# EAGLE board amyboard (EAGLE 6.1)
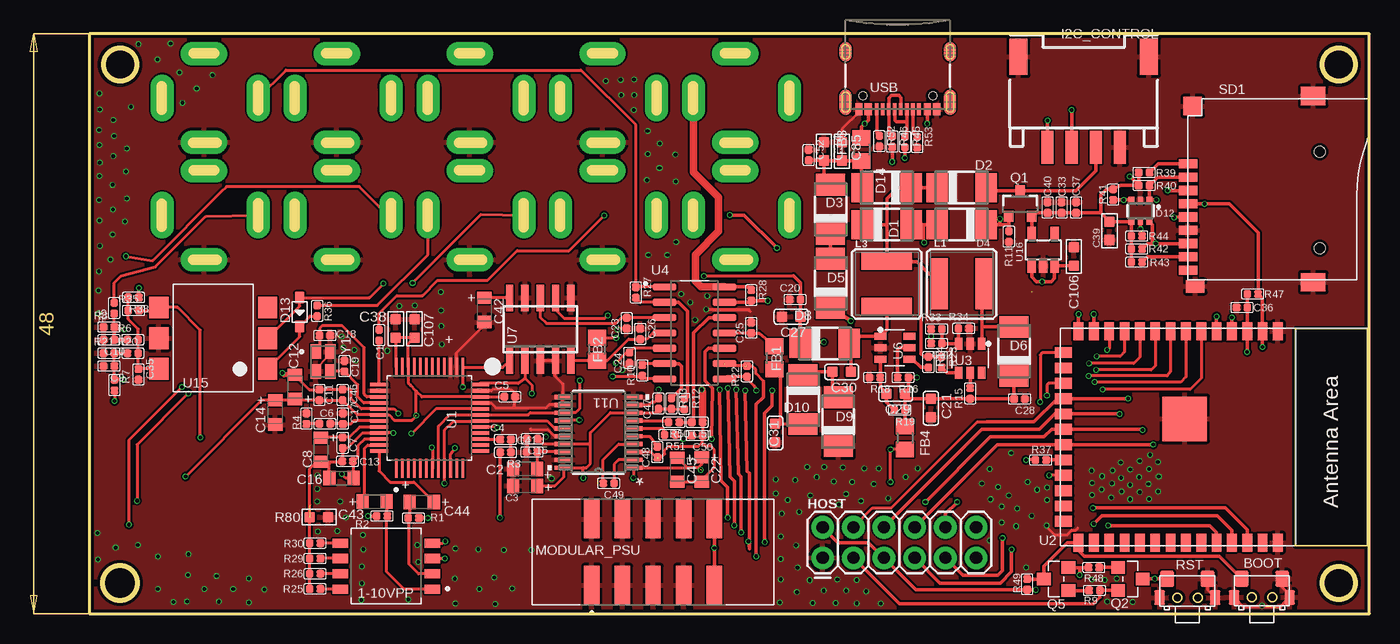
[diagram p0: board, top side]
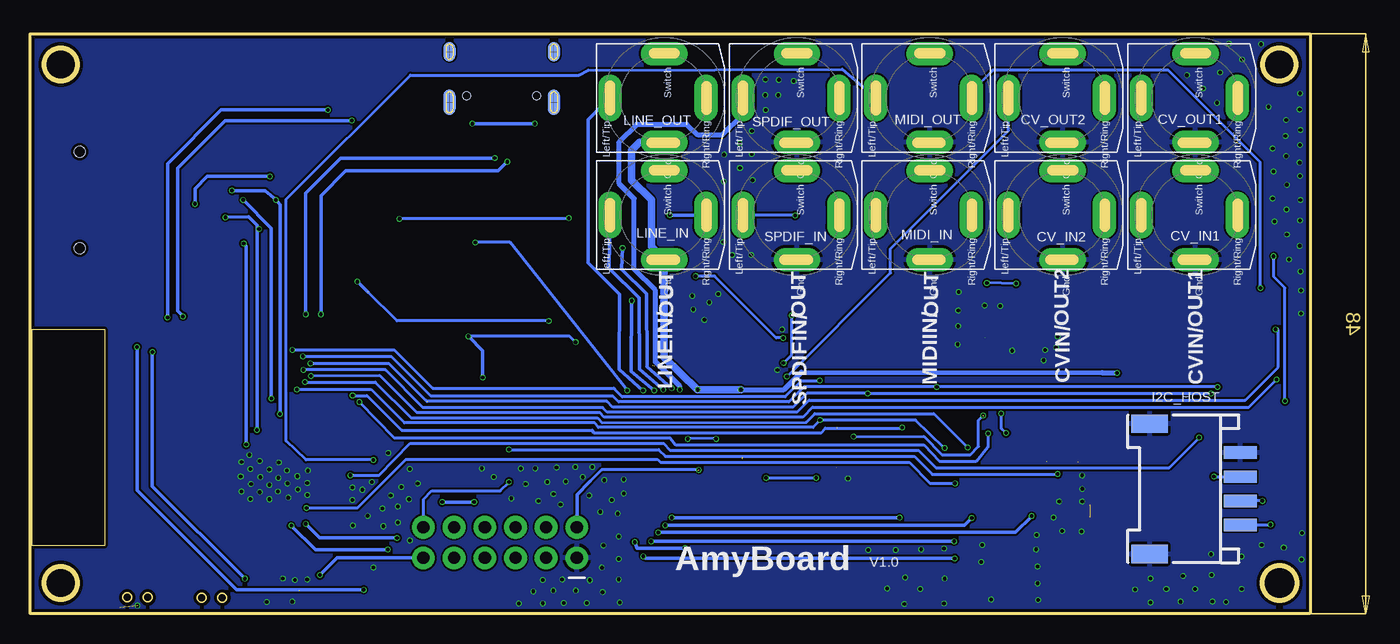
[diagram p1: board, bottom side, seen from below]

Size 106 x 48 mm. Coordinates in mm from the lower left corner, seen from the top.
Outline: 0,0 106,0 106,48 0,48 0,0
Outline: circle at 2.54,45.47 radius 1.37
Outline: circle at 2.54,2.54 radius 1.44
Outline: circle at 103.45,2.54 radius 1.37
Outline: circle at 103.45,45.47 radius 1.37
Copper layers (1*16): Top 0.035mm / dielectric 1.5mm / Bottom 0.035mm
Design rules: minimum track width 6mil, minimum drill 0.3mm, track to track 6mil, track to pad 6mil, pad to pad 6mil, via to via 6mil, smd to smd 6mil, copper to edge 10mil, drill to drill 1mil, minimum pad ring 3mil, minimum via ring 3mil, stop-mask expansion 4mil, vias tented up to drill 0mil, thermal gap 10mil
Net classes: 0 default: width 0.152 mm, drill 0.305 mm, clearance 0.152 mm

## Footprints (pad centres in the part's own frame; a part is rotated, then mirrored left to right if it is on the bottom)
SW_218-4LPSTR = smd 1.27 x 0.76: 1 -3.81,1.905; 2 -3.81,0.635; 3 -3.81,-0.635; 4 -3.81,-1.905; 5 3.81,-1.905; 6 3.81,-0.635; 7 3.81,0.635; 8 3.81,1.905
2*4*3.5MM = smd 1.15 x 1.3: 1 -1.675,0; 2 1.675,0 | smd 0.9 x 1.2: 3 2.3,1.55; 4 -2.3,1.55
DISCRETE_C0402 = smd 0.635 x 0.635: 1 -0.445,0; 2 0.445,0
SMC_Z = smd 1 x 1.2: + -1,0; - 1,0
C0603 = smd 0.889 x 0.889: 1 0,0.762; 2 0,-0.762
DISCRETE_C0603 = smd 0.889 x 0.889: 1 -0.762,0; 2 0.762,0
0603 = smd 0.889 x 0.889: 1 -0.762,0; 2 0.762,0
NV-PJ3410_SOCKET = drill 0.33 pad 1.93 long: GND 3.69,0; LEFT/TIP 0,-4.49; RIGHT/RING 0,3.459; SWITCH -3.674,0
DO-214AC = smd 1.8 x 2.4: A 2.025,0; C -2.025,0
SOT363 = smd 0.5 x 0.5: 1 -0.75,-0.9; 3 0.75,-0.9; 4 0.75,0.9; 6 -0.75,0.9 | smd 0.4 x 0.5: 2 0,-0.9; 5 0,0.9
SOD323 = smd 1 x 0.8: + -1.2,0; - 1.2,0
R0805 = smd 1.3 x 1.5: 1 -0.95,0; 2 0.95,0
2X6 = drill 1.016 pad 1.88: 1 0,0; 2 0,2.54; 3 2.54,0; 4 2.54,2.54; 5 5.08,0; 6 5.08,2.54; 7 7.62,0; 8 7.62,2.54; 9 10.16,0; 10 10.16,2.54; 11 12.7,0; 12 12.7,2.54
HW4-SMD-2.0-90D = smd 1.01 x 2.74: 1 -3,-0.1; 2 -1,-0.1; 3 1,-0.1; 4 3,-0.1 | smd 1.5 x 3: SS1 -5.4,7.4; SS2 5.4,7.4
CR54 = smd 4.2 x 1.4: P$1 0,1.85; P$2 0,-1.85
AMPHENOL_52601-G10-8LF = smd 1.27 x 3.18: 01 -5.08,-2.73; 02 -5.08,2.73; 03 -2.54,-2.73; 04 -2.54,2.73; 05 0,-2.73; 06 0,2.73; 07 2.54,-2.73; 08 2.54,2.73; 09 5.08,-2.73; 10 5.08,2.73
PW20_TEX = smd 1.473 x 0.356: 1 -2.921,2.925; 2 -2.921,2.275; 3 -2.921,1.625; 4 -2.921,0.975; 5 -2.921,0.325; 6 -2.921,-0.325; 7 -2.921,-0.975; 8 -2.921,-1.625; 9 -2.921,-2.275; 10 -2.921,-2.925; 11 2.921,-2.925; 12 2.921,-2.275; 13 2.921,-1.625; 14 2.921,-0.975; 15 2.921,-0.325; 16 2.921,0.325; 17 2.921,0.975; 18 2.921,1.625; 19 2.921,2.275; 20 2.921,2.925
SOT23-3 = smd 0.8 x 0.9: 1 -0.95,-1; 2 0.95,-1; 3 0,1.1
SOT23 = smd 1.016 x 1.143: 1 -0.95,-1.016; 2 0.95,-1.016; 3 0,1.016
DISCRETE_R0402 = smd 0.635 x 0.635: 1 -0.445,0; 2 0.445,0
DISCRETE_R0603 = smd 0.889 x 0.889: 1 -0.762,0; 2 0.762,0
9P-SMD-W/-RING = smd 1.524 x 0.762: 1 0,4.4; 2 0,3.3; 3 0,2.2; 4 0,1.1; 5 0,0; 6 0,-1.1; 7 0,-2.2; 8 0,-3.3; 9 0,-4.4 | smd 1.524 x 1.016: G1 0.6,-5.746 | smd 2.032 x 1.524: G2 10.373,-5.4; G3 10.373,10 | smd 1.524 x 1.524: G4 0.392,9.181 | hole 0.889: 10.9,-2.6; 10.9,5.4
QFP50P900X900X160-48N = smd 1.56 x 0.28: 1 -4.18,2.75; 2 -4.18,2.25; 3 -4.18,1.75; 4 -4.18,1.25; 5 -4.18,0.75; 6 -4.18,0.25; 7 -4.18,-0.25; 8 -4.18,-0.75; 9 -4.18,-1.25; 10 -4.18,-1.75; 11 -4.18,-2.25; 12 -4.18,-2.75; 25 4.18,-2.75; 26 4.18,-2.25; 27 4.18,-1.75; 28 4.18,-1.25; 29 4.18,-0.75; 30 4.18,-0.25; 31 4.18,0.25; 32 4.18,0.75; 33 4.18,1.25; 34 4.18,1.75; 35 4.18,2.25; 36 4.18,2.75 | smd 0.28 x 1.56: 13 -2.75,-4.18; 14 -2.25,-4.18; 15 -1.75,-4.18; 16 -1.25,-4.18; 17 -0.75,-4.18; 18 -0.25,-4.18; 19 0.25,-4.18; 20 0.75,-4.18; 21 1.25,-4.18; 22 1.75,-4.18; 23 2.25,-4.18; 24 2.75,-4.18; 37 2.75,4.18; 38 2.25,4.18; 39 1.75,4.18; 40 1.25,4.18; 41 0.75,4.18; 42 0.25,4.18; 43 -0.25,4.18; 44 -0.75,4.18; 45 -1.25,4.18; 46 -1.75,4.18; 47 -2.25,4.18; 48 -2.75,4.18
ESP32-­S2-­SOLO = smd 1.5 x 0.9: 1 -8.75,5.26; 2 -8.75,3.99; 3 -8.75,2.72; 4 -8.75,1.45; 5 -8.75,0.18; 6 -8.75,-1.09; 7 -8.75,-2.36; 8 -8.75,-3.63; 9 -8.75,-4.9; 10 -8.75,-6.17; 11 -8.75,-7.44; 12 -8.75,-8.71; 13 -8.75,-9.98; 14 -8.75,-11.25; 27 8.75,-11.25; 28 8.75,-9.98; 29 8.75,-8.71; 30 8.75,-7.44; 31 8.75,-6.17; 32 8.75,-4.9; 33 8.75,-3.63; 34 8.75,-2.36; 35 8.75,-1.09; 36 8.75,0.18; 37 8.75,1.45; 38 8.75,2.72; 39 8.75,3.99; 40 8.75,5.26 | smd 0.9 x 1.5: 15 -6.985,-12.5; 16 -5.715,-12.5; 17 -4.445,-12.5; 18 -3.175,-12.5; 19 -1.905,-12.5; 20 -0.635,-12.5; 21 0.635,-12.5; 22 1.905,-12.5; 23 3.175,-12.5; 24 4.445,-12.5; 25 5.715,-12.5; 26 6.985,-12.5 | smd 3.7 x 3.7: 41 -1.5,-2.46
SOT-23-6 = smd 1 x 0.6: 1 -1.2,0.95; 2 -1.2,0; 3 -1.2,-0.95; 4 1.2,-0.95; 5 1.2,0; 6 1.2,0.95
SOIC127P600X175-14N = smd 1.97 x 0.6: 1 -2.475,3.81; 2 -2.475,2.54; 3 -2.475,1.27; 4 -2.475,0; 5 -2.475,-1.27; 6 -2.475,-2.54; 7 -2.475,-3.81; 8 2.475,-3.81; 9 2.475,-2.54; 10 2.475,-1.27; 11 2.475,0; 12 2.475,1.27; 13 2.475,2.54; 14 2.475,3.81
SOIC-10 = smd 0.6 x 2.2: 1 -2.54,-2.6; 2 -1.27,-2.6; 3 0,-2.6; 4 1.27,-2.6; 5 2.54,-2.6; 6 2.54,2.6; 7 1.27,2.6; 8 0,2.6; 9 -1.27,2.6; 10 -2.54,2.6
SOP-6-2.54MM = smd 1.6 x 1.8: 1 -4.5,2.54; 2 -4.5,0; 3 -4.5,-2.54; 4 4.5,-2.54; 5 4.5,0; 6 4.5,2.54
SOT23-5 = smd 0.69 x 1.2: 1 -0.95,-1.3; 2 0,-1.3; 3 0.95,-1.3; 4 0.95,1.3; 5 -0.95,1.3
USB-C-16P-5 = smd 0.3 x 1: A5 -1.25,-0.34; A6 -0.25,-0.34; A7 0.25,-0.34; A8 1.25,-0.34; B5 1.75,-0.34; B6 0.75,-0.34; B7 -0.75,-0.34; B8 -1.75,-0.34 | smd 0.6 x 1: GND -3.225,-0.34; GND2 3.225,-0.34; VBUS1 -2.45,-0.34; VBUS2 2.45,-0.34 | smd 1 x 2.1: SHLD1 -4.32,-0.915; SHLD2 4.32,-0.915 | smd 1 x 2.1 bottom: SHLD3 -4.32,-0.915; SHLD4 4.32,-0.915 | smd 1 x 1.6: SHLD5 -4.32,-5.095; SHLD8 4.32,-5.095 | smd 1 x 1.6 bottom: SHLD6 -4.32,-5.095; SHLD7 4.32,-5.095 | hole 0.65: -2.89,-1.445; 2.89,-1.445
XTAL_ABM10W-22.5792MHZ-8-K1Z-T3 = smd 0.85 x 1.2: 1 -0.6,0.812; 2 -0.6,-0.812; 3 0.6,-0.812; 4 0.6,0.812

## Placement (x,y rotation side)
1-10VPP  218-4LPSTR  [SW_218-4LPSTR]  24.59,3.94 180 top
BOOT  TS24CA  [2*4*3.5MM]  97.1,2.9 180 top
C1  100nF  [DISCRETE_C0402]  24,23.06 90 top
C2  10uF/10V/TAN  [SMC_Z]  36.09,11.99 180 top
C3  10uF/10V/TAN  [SMC_Z]  36.09,10.59 180 top
C4  100nF  [DISCRETE_C0402]  34.47,14.43 0 top
C5  100nF  [DISCRETE_C0402]  34.82,17.96 0 top
C6  68nF  [DISCRETE_C0402]  19.51,15.72 0 top
C7  100nF  [DISCRETE_C0402]  20.98,14.15 270 top
C8  10uF/10V/TAN  [SMC_Z]  19.18,13.56 270 top
C9  1nF  [DISCRETE_C0402]  1.63,20.5 180 top
C10  1nF  [DISCRETE_C0402]  1.63,22.68 180 top
C11  100nF  [DISCRETE_C0402]  19.05,18.11 90 top
C12  10uF/10V/TAN  [SMC_Z]  17.04,18.77 90 top
C13  100nF  [DISCRETE_C0402]  21.39,12.62 180 top
C14  10uF/10V/TAN  [SMC_Z]  15.39,16.66 270 top
C15  100nF  [DISCRETE_C0402]  36.68,14.48 180 top
C16  10uF/10V/TAN  [SMC_Z]  20.88,11.23 180 top
C17  4.7nF  [DISCRETE_C0402]  21.01,16.15 270 top
C18  10pF  [DISCRETE_C0402]  19.51,23.04 180 top
C19  10pF  [DISCRETE_C0402]  21.13,20.5 270 top
C20  100nF  [DISCRETE_C0402]  58.45,26.01 0 top
C21  22uF  [C0603]  69.7,17.02 0 top
C22  10uF/10V/TAN  [SMC_Z]  50.7,11.94 270 top
C23  100nF  [DISCRETE_C0402]  44.5,24.05 90 top
C24  100nF  [DISCRETE_C0402]  44.73,21.18 90 top
C25  100nF  [DISCRETE_C0402]  54.81,23.67 90 top
C26  100nF  [DISCRETE_C0402]  45.62,23.16 270 top
C27  22uF  [C0603]  58.12,24.59 270 top
C28  100nF  [DISCRETE_C0402]  77.04,17.78 180 top
C29  22pF  [C0603]  66.78,18.21 270 top
C30  22uF  [C0603]  62.31,20.02 270 top
C31  22uF  [C0603]  56.79,14.96 180 top
C32  22pF  [DISCRETE_C0402]  70.15,22.38 180 top
C33  100nF  [DISCRETE_C0402]  80.52,33.63 270 top
C34  10uF  [DISCRETE_C0603]  60.83,38.28 270 top
C35  100nF  [DISCRETE_C0402]  4.06,19.81 270 top
C36  100nF  [DISCRETE_C0402]  95.45,25.35 0 top
C37  100nF  [DISCRETE_C0402]  81.71,33.63 270 top
C38  10uF  [DISCRETE_C0603]  25.37,23.6 90 top
C39  10uF  [DISCRETE_C0603]  84.48,31.7 90 top
C40  100nF  [DISCRETE_C0402]  79.35,33.63 90 top
C41  100nF  [DISCRETE_C0402]  36.65,13.39 0 top
C42  10uF/10V/TAN  [SMC_Z]  32.72,25.15 270 top
C43  10uF/10V/TAN  [SMC_Z]  23.62,9.27 0 top
C44  10uF/10V/TAN  [SMC_Z]  27.53,9.25 180 top
C45  10uF/10V/TAN  [SMC_Z]  48.69,11.91 270 top
C46  100nF  [DISCRETE_C0402]  20.98,18.11 90 top
C47  100nF  [DISCRETE_C0402]  47.14,17.4 90 top
C48  2.2uF  [DISCRETE_C0402]  47.04,13.39 90 top
C49  2.2uF  [DISCRETE_C0402]  43,10.79 180 top
C50  2.2nF  [DISCRETE_C0402]  50.34,14.76 180 top
C51  2.2nF  [DISCRETE_C0402]  50.34,15.85 180 top
C52  100nF  [DISCRETE_C0402]  59.56,37.97 270 top
C85  10uF  [DISCRETE_C0603]  62.33,38.28 270 top
C106  4.7uF/16V  [0603]  81.53,29.57 90 top
C107  10uF  [0603]  26.92,23.6 90 top
CV_IN1  NV-PJ3410_STEREO  [NV-PJ3410_SOCKET]  9.5,33 270 bottom
CV_IN2  NV-PJ3410_STEREO  [NV-PJ3410_SOCKET]  20.5,33 270 bottom
CV_OUT1  NV-PJ3410_STEREO  [NV-PJ3410_SOCKET]  9.5,42.7 270 bottom
CV_OUT2  NV-PJ3410_STEREO  [NV-PJ3410_SOCKET]  20.5,42.7 270 bottom
D1  SS54  [DO-214AC]  66.04,32.21 0 top
D2  SS54  [DO-214AC]  72.24,35.28 0 top
D3  SS54  [DO-214AC]  61.39,33.48 90 top
D4  SS54  [DO-214AC]  72.24,32.21 180 top
D5  SS54  [DO-214AC]  61.39,27.36 90 top
D6  SS54  [DO-214AC]  76.58,21.72 90 top
D8  SS54  [DO-214AC]  60.91,22.38 0 top
D9  SS54  [DO-214AC]  62.03,15.9 90 top
D10  SS54  [DO-214AC]  59.11,17.73 270 top
D12  SMF05C  [SOT363]  87.05,33.35 180 top
D13  1N4148WS  [SOD323]  17.42,24.97 270 top
D14  SS54  [DO-214AC]  66.04,35.28 180 top
FB1  100Mhz@120R  [R0805]  56.74,21.18 90 top
FB2  100Mhz@120R  [R0805]  42.04,21.89 270 top
FB3  100Mhz@120R  [R0805]  63.96,38.43 270 top
FB4  100Mhz@120R  [R0805]  67.54,14.55 270 top
HOST  2X6 FEMALE  [2X6]  60.73,4.62 0 top
I2C_CONTROL  [HW4-SMD-2.0-90D]  82.35,38.71 0 top
I2C_HOST  [HW4-SMD-2.0-90D]  5.89,10.34 90 bottom
L1  4.7µH/±30%/3.4A  [CR54]  72.24,27.3 90 top
L3  3.3µH/±30%/3.4A  [CR54]  66.04,27.3 0 top
LINE_IN  NV-PJ3410_STEREO  [NV-PJ3410_SOCKET]  53.5,33 270 bottom
LINE_OUT  NV-PJ3410_STEREO  [NV-PJ3410_SOCKET]  53.5,42.7 270 bottom
MIDI_IN  NV-PJ3410_STEREO  [NV-PJ3410_SOCKET]  31.5,33 270 bottom
MIDI_OUT  NV-PJ3410_STEREO  [NV-PJ3410_SOCKET]  31.5,42.7 270 bottom
MODULAR_PSU  52601-G10-8LF  [AMPHENOL_52601-G10-8LF]  46.69,5.11 0 top
PCM5101  U11  [PW20_TEX]  42.16,15.01 180 top
Q1  AO3407  [SOT23-3]  77.09,33.91 0 top
Q2  S8050  [SOT23]  86.21,2.87 270 top
Q5  S8050  [SOT23]  80.06,2.87 90 top
R1  51K  [DISCRETE_R0402]  26.85,7.92 0 top
R2  51K  [DISCRETE_R0402]  24.23,8.08 180 top
R3  150R  [DISCRETE_R0402]  34.47,13.36 180 top
R4  680R  [DISCRETE_R0402]  17.98,16.15 90 top
R5  30K  [DISCRETE_R0402]  2.06,25.3 90 top
R6  10K  [DISCRETE_R0402]  3.61,22.68 0 top
R7  30K  [DISCRETE_R0402]  2.08,18.92 270 top
R8  15K  [DISCRETE_R0402]  1.63,23.72 0 top
R9  10K  [DISCRETE_R0402]  83.24,1.93 0 top
R10  30K  [DISCRETE_R0402]  45.8,20.14 90 top
R11  100K  [DISCRETE_R0402]  76.15,31.22 90 top
R12  10K  [DISCRETE_R0402]  49.28,17.37 270 top
R13  10K  [DISCRETE_R0402]  48.21,17.4 270 top
R14  100K  [DISCRETE_R0402]  69.49,20.83 270 top
R15  0R  [DISCRETE_R0402]  72.95,18.24 90 top
R16  0R  [DISCRETE_R0402]  67.39,19.56 180 top
R18  12K  [DISCRETE_R0402]  65.05,19.56 180 top
R19  228K  [DISCRETE_R0402]  67.11,16.87 180 top
R20  10K  [DISCRETE_R0402]  3.61,21.56 0 top
R21  15K  [DISCRETE_R0402]  1.63,21.56 0 top
R22  51K  [DISCRETE_R0402]  54.46,20.07 90 top
R23  100K  [DISCRETE_R0402]  70.59,20.83 270 top
R25  22K  [DISCRETE_R0402]  18.69,2.06 0 top
R26  22K  [DISCRETE_R0402]  18.69,3.3 0 top
R27  30K  [DISCRETE_R0402]  45.26,26.59 270 top
R28  51K  [DISCRETE_R0402]  54.81,26.37 270 top
R29  22K  [DISCRETE_R0402]  18.69,4.57 0 top
R30  22K  [DISCRETE_R0402]  18.69,5.84 0 top
R33  110K  [DISCRETE_R0402]  70.15,23.57 0 top
R34  15K  [DISCRETE_R0402]  72.42,23.62 0 top
R35  470R  [DISCRETE_R0402]  3.66,25.1 0 top
R36  220R  [DISCRETE_R0402]  18.87,25.07 270 top
R37  10R  [DISCRETE_R0402]  78.79,12.73 0 top
R38  33R  [DISCRETE_R0402]  3.66,26.19 180 top
R39  10K  [DISCRETE_R0402]  87.35,36.53 180 top
R40  10K  [DISCRETE_R0402]  87.35,35.46 180 top
R41  10K  [DISCRETE_R0402]  84.79,34.7 90 top
R42  10K  [DISCRETE_R0402]  86.74,30.2 180 top
R43  10K  [DISCRETE_R0402]  86.74,29.11 180 top
R44  NC  [DISCRETE_R0402]  86.74,31.27 180 top
R45  51R  [DISCRETE_R0402]  67.54,39.07 270 top
R46  51R  [DISCRETE_R0402]  66.5,39.09 270 top
R47  10K  [DISCRETE_R0402]  96.34,26.47 0 top
R48  10K  [DISCRETE_R0402]  83.19,3.84 180 top
R49  10K  [DISCRETE_R0402]  77.67,2.44 270 top
R50  470R  [DISCRETE_R0402]  48.41,15.85 180 top
R51  470R  [DISCRETE_R0402]  48.08,14.81 180 top
R52  5.1K  [DISCRETE_R0402]  65.43,39.12 270 top
R53  5.1K  [DISCRETE_R0402]  68.55,39.04 270 top
R80  0R  [DISCRETE_R0603]  19.02,8 0 top
RST  TS24CA  [2*4*3.5MM]  90.93,2.88 180 top
SD1  SD  [9P-SMD-W/-RING]  90.98,32.84 0 top
SPDIF_IN  NV-PJ3410_STEREO  [NV-PJ3410_SOCKET]  42.5,33 270 bottom
SPDIF_OUT  NV-PJ3410_STEREO  [NV-PJ3410_SOCKET]  42.5,42.7 270 bottom
U1  PCM9211PT  [QFP50P900X900X160-48N]  28.17,16.21 90 top
U2  ESP32­S2­SOLO  [ESP32-­S2-­SOLO]  93.17,14.63 270 top
U3  HX3608  [SOT-23-6]  72.95,21.16 270 top
U4  TL074CD  [SOIC127P600X175-14N]  50.11,23.24 0 top
U6  HX3608  [SOT-23-6]  66.7,22.02 0 top
U7  GP8413  [SOIC-10]  37.34,23.55 0 top
U15  H11L1SR2M  [SOP-6-2.54MM]  10.26,22.81 180 top
U16  SPX3819  [SOT23-5]  78.99,30.12 0 top
USB  USB-C  [USB-C-16P-5]  66.95,41.43 180 top
Y1  22.5792MHZ  [XTAL_ABM10W-22.5792MHZ-8-K1Z-T3]  19.35,20.88 0 top

## Library data of the parts
1-10VPP = 218-4LPSTR; AVAILABILITY: In Stock; CHECK_PRICES: https://www.snapeda.com/parts/218-4LPSTR/CTS+Components/view-part/?ref=eda; DESCRIPTION: Dip Switch SPST 4 Position Surface Mount Slide (Standard) Actuator 25mA 24VDC; MF: CTS Electrocomponents; MP: 218-4LPSTR; PACKAGE: None; PRICE: None; SNAPEDA_LINK: https://www.snapeda.com/parts/218-4LPSTR/CTS+Components/view-part/?ref=snap
BOOT RST U15 = sale
C1 C4-C7 C9-C11 C13 C15 C17-C20 C23-C26 C28 C32-C41 C46-C52 C85 R1-R16 R18-R23 R25-R30 R33-R53 R80 = A9G
C2 C3 C8 C12 C14 C16 C22 C42-C45 FB1-FB4 = rcl
C21 C27 C29-C31 = Discrete-new
C106 C107 D13 Q2 Q5 = Discrete
CV_IN1 CV_IN2 CV_OUT1 CV_OUT2 LINE_IN LINE_OUT MIDI_IN MIDI_OUT SPDIF_IN SPDIF_OUT = PJ3410_sockets
D1-D6 D8-D10 D14 = diode
D12 = microbuilder
HOST = SparkFun-Connectors; PROD_ID: CONN-12423
I2C_CONTROL I2C_HOST = Connector-new
L1 L3 = SparkFun-Coils; PROD_ID: NDUC-11157
MODULAR_PSU = 52601-G10-8LF; AVAILABILITY: In Stock; CHECK_PRICES: https://www.snapeda.com/parts/52601-G10-8LF/Amphenol+FCI/view-part/?ref=eda; DESCRIPTION: Conn; Rect; Header; SMT; Shroud; 2.54 mm; 2-Row; 10 Pos; Gold (30) Plate;Quickie | Amphenol FCI (Amphenol CS) 52601-G10-8LF; MF: Amphenol ICC; MP: 52601-G10-8LF; PACKAGE: None; PRICE: None; SNAPEDA_LINK: https://www.snapeda.com/parts/52601-G10-8LF/Amphenol+FCI/view-part/?ref=snap
PCM5101 = pcm5101apw; COPYRIGHT: Copyright (C) 2022 Ultra Librarian. All rights reserved.; DIGI-KEY_PART_NUMBER_1: PCM5101APW-ND; MANUFACTURER_PART_NUMBER: PCM5101APW; MFR_NAME: Texas Instruments
Q1 = User-Submitted; PROD_ID: TRANS-08285
SD1 = Connector
U1 = PCM9211PT; AVAILABILITY: In Stock; CHECK_PRICES: https://www.snapeda.com/parts/PCM9211PT/Texas+Instruments/view-part/?ref=eda; DESCRIPTION: 216kHz Digital Audio Interface Transceiver (DIX) with Stereo ADC and Routing; MF: Texas Instruments; MP: PCM9211PT; PACKAGE: LQFP-48 Texas Instruments; PRICE: None; SNAPEDA_LINK: https://www.snapeda.com/parts/PCM9211PT/Texas+Instruments/view-part/?ref=snap
U2 U3 U6 = self
U4 = TL074CD; AVAILABILITY: In Stock; CHECK_PRICES: https://www.snapeda.com/parts/TL074CD/Texas+Instruments/view-part/?ref=eda; DESCRIPTION: Quad, 30-V, 3-MHz, high slew rate (13-V/µs), In to V+, JFET-input op amp; MF: Texas Instruments; MP: TL074CD; PACKAGE: SOIC-14 Texas Instruments; PRICE: None; SNAPEDA_LINK: https://www.snapeda.com/parts/TL074CD/Texas+Instruments/view-part/?ref=snap
U7 = FL5160MX; AVAILABILITY: In Stock; CHECK_PRICES: https://www.snapeda.com/parts/FL5160MX/Onsemi/view-part/?ref=eda; DESCRIPTION: Optocoupler Drive 1-CH 5.5V 10-Pin SOIC N T/R; MF: onsemi; MP: FL5160MX; PACKAGE: None; PRICE: None; SNAPEDA_LINK: https://www.snapeda.com/parts/FL5160MX/Onsemi/view-part/?ref=snap
U16 = IC
USB = USBC
Y1 = ABM10W-22.5792MHZ-8-K1Z-T3; AVAILABILITY: In Stock; CHECK_PRICES: https://www.snapeda.com/parts/ABM10W-22.5792MHZ-8-K1Z-T3/Abracon/view-part/?ref=eda; DESCRIPTION: IoT OPTIMIZED LOW PROFILE QUARTZ CRYSTAL; MF: Abracon; MP: ABM10W-22.5792MHZ-8-K1Z-T3; PACKAGE: SMD-4 Abracon; PRICE: None; SNAPEDA_LINK: https://www.snapeda.com/parts/ABM10W-22.5792MHZ-8-K1Z-T3/Abracon/view-part/?ref=snap

## Nets
3.3V: C35.1 R6.2 R20.2 R35.1 R38.2 U15.6
3V3_IN: D2.A I2C_CONTROL.3 Q1.3
5V: C13.1 C16.+ FB4.2 HOST.12 U1.46
5V_IN: C34.2 C52.2 C85.2 D3.A D14.A FB3.2
12_IN: D1.A D4.A MODULAR_PSU.09 MODULAR_PSU.10
12V: C20.2 C21.1 C27.1 C28.2 C29.1 C32.2 D6.C D8.C FB2.1 FB4.1 R15.1 R16.1 R19.1 R33.1
+3V3: C3.+ C5.1 C11.1 C12.+ C14.+ C15.1 C22.+ C33.2 C37.2 C38.1 C39.2 C40.1 C45.+ C46.1 C47.1 C107.1 D12.4 HOST.2 HOST.5 I2C_HOST.3 PCM5101.1 PCM5101.8 PCM5101.17 PCM5101.20 Q1.2 R12.2 R13.2 R39.2 R40.2 R41.2 R42.2 R43.2 R44.2 R47.2 R49.2 SD1.4 U1.22 U1.34 U1.36 U1.42 U2.2 U16.5
+12V: C26.2 FB2.2 U4.4 U7.5
-12V: C25.1 FB1.2 U4.11
ADC1: C10.1 R5.1 R6.1 R8.2 U2.9
ADC2: C9.1 R7.1 R20.1 R21.2 U2.8
AGND: C7.2 C8.- C11.2 C12.- C13.2 C16.- C22.- C45.- C46.2 C47.2 C48.1 C50.1 C51.1 LINE_IN.GND LINE_OUT.GND PCM5101.3 PCM5101.9 R25.1 R26.1 R29.1 R30.1 R80.1 U1.41 U1.45
AMY_FOLLOWER_SCL: I2C_CONTROL.1 U2.5
AMY_FOLLOWER_SDA: I2C_CONTROL.2 U2.4
AMYIN: U1.17 U2.17
AMYOUT: PCM5101.14 U1.10 U2.6
BCLK: PCM5101.13 U1.8 U1.19 U2.12
CV_OUT1: CV_OUT1.LEFT/TIP R27.1 U4.1
CV_OUT2: CV_OUT2.LEFT/TIP R10.1 U4.7
DTR: HOST.11 Q5.2 R48.2
ENABLE: R14.2 U6.4
ENABLE1: R23.2 U3.4
GND: BOOT.1 BOOT.3 BOOT.4 C2.- C3.- C5.2 C9.2 C10.2 C14.- C15.2 C17.1 C18.1 C19.1 C20.1 C21.2 C23.1 C24.1 C25.2 C26.1 C27.2 C28.1 C31.1 C33.1 C34.1 C35.2 C36.1 C37.1 C38.2 C39.1 C40.2 C41.1 C42.- C52.1 C85.1 C106.2 C107.2 CV_IN1.GND CV_IN2.GND CV_OUT1.GND CV_OUT2.GND D9.C D12.2 HOST.1 I2C_CONTROL.4 I2C_CONTROL.SS1 I2C_CONTROL.SS2 I2C_HOST.4 I2C_HOST.SS1 I2C_HOST.SS2 MIDI_IN.GND MIDI_OUT.GND MODULAR_PSU.01 MODULAR_PSU.02 MODULAR_PSU.03 MODULAR_PSU.04 MODULAR_PSU.05 MODULAR_PSU.06 MODULAR_PSU.07 MODULAR_PSU.08 PCM5101.10 PCM5101.11 PCM5101.12 PCM5101.16 PCM5101.19 R4.2 R8.1 R11.1 R18.2 R21.1 R34.2 R52.2 R53.2 R80.2 RST.1 RST.3 RST.4 SD1.6 SD1.G1 SD1.G2 SD1.G3 SD1.G4 SPDIF_IN.GND SPDIF_OUT.GND U1.21 U1.23 U1.26 U1.27 U1.38 U2.1 U2.40 U2.41 U3.2 U6.2 U7.3 U7.4 U7.6 U7.9 U15.5 U16.2 USB.GND USB.GND2 Y1.2 Y1.4
I2C_SCL: I2C_HOST.1 U1.25 U2.11 U7.1
I2C_SDA: I2C_HOST.2 U1.24 U2.10 U7.2
IO0: BOOT.2 Q5.3 R49.1 U2.27
IO19: R45.2 U2.13
IO20: R46.2 U2.14
LIN: LINE_IN.LEFT/TIP R2.2
LINX: C43.+ U1.47
LOUT: LINE_OUT.LEFT/TIP R22.1 U4.8
LOUT_2V: C50.2 R51.1 U4.10
LRC: PCM5101.15 U1.9 U1.18 U2.38
MCLK: U1.20 U2.15
MIDI_IN: R35.2 U2.23 U15.4
MIDI_OUT: R37.2 U2.22
MPIO: U1.7 U2.7
N$1: C1.1 U1.37
N$2: C4.2 R3.1
N$3: C4.1 U1.15
N$4: 1-10VPP.1 C43.- R2.1
N$5: 1-10VPP.2 C44.- R1.1
N$6: C7.1 C8.+ U1.44
N$7: C6.2 C17.2 U1.43
N$8: C6.1 R4.1
N$9: SPDIF_OUT.RIGHT/RING
N$10: SPDIF_IN.RIGHT/RING
N$11: CV_OUT1.RIGHT/RING
N$12: CV_OUT2.RIGHT/RING
N$13: CV_IN2.LEFT/TIP R7.2
N$14: CV_IN2.RIGHT/RING
N$15: D6.A L1.P$2 U3.1
N$16: C31.2 D10.A FB1.1
N$17: CV_IN1.RIGHT/RING
N$18: C23.2 U4.3 U7.8
N$19: CV_IN1.LEFT/TIP R5.2
N$20: C24.2 U4.5 U7.7
N$21: C30.1 D8.A L3.P$2 U6.1
N$22: C42.+ U7.10
N$23: D3.C D4.C D5.A Q1.1 R11.2
N$24: C106.1 D5.C U16.1 U16.3
N$25: C32.1 R33.2 R34.1 U3.3
N$26: C29.2 R18.1 R19.2 U6.3
N$28: R16.2 U6.5
N$29: C30.2 D9.A D10.C
N$31: R10.2 R13.1 U4.6
N$32: R15.2 U3.5
N$33: R12.1 R27.2 U4.2
N$34: Q2.1 R48.1
N$35: 1-10VPP.5 R30.2
N$36: 1-10VPP.6 R29.2
N$37: Q5.1 R9.1
N$38: R53.1 USB.A5
N$39: R52.1 USB.B5
N$40: 1-10VPP.8 R25.2
N$41: 1-10VPP.7 R26.2
N$42: FB3.1 USB.VBUS1 USB.VBUS2
N$44: 1-10VPP.3 R22.2 U4.9
N$45: 1-10VPP.4 R28.2 U4.13
N$48: C2.+ C41.2 PCM5101.18
N$50: PCM5101.7 R50.2
N$51: C49.2 PCM5101.4
N$52: C49.1 PCM5101.2
N$55: D13.+ MIDI_IN.LEFT/TIP U15.2
N$56: MIDI_IN.RIGHT/RING R36.1
N$57: D13.- R36.2 U15.1
N$58: MIDI_OUT.LEFT/TIP R37.1
N$59: MIDI_OUT.RIGHT/RING R38.1
N$75: R39.1 SD1.1
N$77: R43.1 SD1.8
OUTL: PCM5101.6 R51.2
RESET: C36.2 Q2.3 R47.1 RST.2 U2.3
RIN: LINE_IN.RIGHT/RING R1.2
RINX: C44.+ U1.48
ROUT: LINE_OUT.RIGHT/RING R28.1 U4.14
ROUT_2V: C51.2 R50.1 U4.12
RTS: HOST.3 Q2.2 R9.2
RXD/IO44: HOST.7 U2.36
SPDIFIN_SIGNAL: C1.2 SPDIF_IN.LEFT/TIP
SPDIFOUT_SIGNAL: R3.2 SPDIF_OUT.LEFT/TIP
SPI0_CS0: D12.1 HOST.4 R40.1 SD1.2 U2.18
SPI0_MISO: D12.6 HOST.8 R42.1 SD1.7 U2.21
SPI0_MOSI: D12.3 HOST.6 R41.1 SD1.3 U2.19
SPI0_SCK: D12.5 HOST.10 R44.1 SD1.5 U2.20
TXD/IO43: HOST.9 U2.37
USB_D+: R46.1 USB.A6 USB.B6
USB_D-: R45.1 USB.A7 USB.B7
VNEG: C48.2 PCM5101.5
VPWR: D1.C D2.C D14.C L1.P$1 L3.P$1 R14.1 R23.1
XTI: C18.2 U1.39 Y1.1
XTO: C19.2 U1.40 Y1.3

## Tracks (layer width: path | path; a pad name or v marks a point on that pad's centre or on a via)
3.3V
  Top 0.254: U15.6 4.08,20.27 C35.1 4.06,21.55 R20.2 R6.2 4.05,23.56 3.23,24.38 3.23,25.08 R35.1 R38.2
3V3_IN
  Top 0.305: D2.A 74.53,35.01 Q1.3 81.69,35.01 83.34,36.65 83.34,38.6 I2C_CONTROL.3
5V  (via drill 0.3)  (1 unrouted)
  Top 0.254: U1.46 22.79,14.46 22.23,13.89 22.23,12.95 21.84,12.57 | FB4.2 66.36,13.6 v66.34,13.59 v66.34,10.9 | C13.1 21.83,11.27 C16.+ 21.23,11.23 v20.9,11.56
  Bottom 0.254: v66.34,13.59 53.95,13.59 53.39,13.03 32.79,13.03 31.29,11.53 v20.9,11.56 | HOST.12 73.43,9.47 72.75,10.16 67.08,10.16 v66.34,10.9
5V_IN
  Top 0.305: C34.2 C85.2 62.37,37.48 FB3.2 63.96,35.34 D14.A | C34.2 60.83,36.06 D3.A | C52.2 C34.2
12_IN  (via drill 0.3)
  Top 0.254: v69.14,30.73 69.11,30.76 69.11,32.21
  Top 0.305: D1.A 69.11,32.21 D4.A | MODULAR_PSU.09 v51.77,5.44 MODULAR_PSU.10 | v55.93,5.92 55.93,16.61 56.52,17.2 v56.54,18.47
  Bottom 0.254: v56.54,18.47 66.27,30.73 v69.14,30.73
  Bottom 0.305: v51.77,5.44 55.75,5.41 v55.93,5.92
12V  (via drill 0.3)
  Top 0.254: FB2.1 43.63,22.84 v43.64,22.84 | 58.88,23.96 58.88,23.97 C27.1 | D8.C 58.88,22.5 | 58.88,22.5 58.88,24.74 | v60.83,22.48 58.9,22.48 58.88,22.5 | 58.88,22.5 58.78,22.61 58.78,22.81 58.8,22.84 58.8,23.29 58.62,23.11 58.62,22.73 58.65,22.71 58.65,22.61 58.8,22.45 58.83,22.45 59.05,22.23 59.05,22 59.03,22.02 58.83,22.02 58.73,22.12 58.73,22.4 59,22.68 59,22.81 59.18,22.99 59.18,23.01 58.85,23.34 58.85,24.77
  Top 0.305: C32.2 v69.71,22.96 R33.1 | 67.55,17.68 R19.1 67.54,16.85 FB4.1 | 67.55,17.68 67.55,18.2 C29.1 67.83,18.5 R16.1 v68.53,19.56 | D8.C 58.88,23.96 | 67.55,17.68 67.65,17.78 C21.1 72.94,17.78 R15.1 76.58,17.79 | D6.C 76.58,17.79 | 76.58,17.79 C28.2 | v50.9,27.94 58.32,27.96 58.9,27.38 58.9,26.02 C20.2 C27.1
  Bottom 0.254: v60.83,22.48 61.32,22.96 v69.71,22.96 | v43.64,22.84 44.22,22.84 49.33,27.94 v50.9,27.94
  Bottom 0.305: v68.53,19.56 68.53,21.78 v69.71,22.96
+3V3  (via drill 0.3)  (4 unrouted)
  Top 0.254: 17.15,17.67 C11.1 C46.1 22.19,16.45 U1.42 24.82,16.46 25.25,16.03 26.72,16.03 27.05,16.36 | 17.15,17.67 C12.+ | U1.36 25.42,22.79 C38.1 C107.1 25.35,22.84 25.3,22.89 | C5.1 U1.22 27.56,17.95 27.08,18.43 | PCM5101.20 40.89,12.09 | 40.89,12.09 41.17,12.09 41.5,12.42 41.5,13.87 | 41.5,13.87 41.35,14.02 39.26,14.02 PCM5101.17 37.56,14.04 C15.1 37.57,14.48 v37.82,14.66 | 41.5,13.87 41.5,14.99 43.16,16.64 PCM5101.8 47.13,16.64 C47.1 R13.2 R12.2 | 49.52,12.09 PCM5101.1 45.09,11.28 v45.06,11.25 | 17.15,17.67 C14.+ 14.28,17.66 v7.98,11.35 | v40.89,11.25 40.89,12.09 | C3.+ 38.56,10.59 39.29,11.33 39.29,12.04 PCM5101.20 | C22.+ 50.7,12.37 50.42,12.09 | 50.42,12.09 49.52,12.09 | 49.52,12.09 C45.+ | 50.42,12.09 50.47,12.09 50.7,11.86 | 26.92,22.86 26.42,22.36 U1.34 26.42,19.09 26.6,18.91 27.08,18.43 | v27.08,16.41 27.08,18.43
  Top 0.305: R40.2 R39.2 | R40.2 85.43,35.46 R41.2 84.24,35.14 83.77,34.67 83.77,33.2 83.76,33.19 | U16.5 Q1.2 78.31,33.19 C40.1 C33.2 C37.2 83.76,33.19 | 83.76,33.19 C39.2 D12.4 R44.2 R42.2 R43.2 | SD1.4 v92.35,33.93 94.39,33.93 96.79,31.53 R47.2 97.16,26.1 U2.2 v97.16,22.07 | HOST.2 62,5.89 64.54,5.89 HOST.5 68.44,1.99 R49.2 78.3,1.99 v78.38,1.98 | R40.2 v86.17,36.2 v86.16,36.2
  Bottom 0.254: v7.98,11.35 5.81,11.35 I2C_HOST.3 | v45.06,11.25 v40.89,11.25 | v37.82,14.66 32,14.68 30.48,13.16 28.14,13.16 27.46,13.84 27.46,16.03 v27.08,16.41 | v50.62,11.91 58.67,11.91 59.66,10.92
  Bottom 0.305: v86.16,36.2 91.34,36.2 92.35,35.18 v92.35,33.93 | v78.38,1.98 88.9,1.98 97.16,10.24 v97.16,22.07 | HOST.2 60.73,9.86 59.66,10.92 59.64,10.95
+12V
  Top 0.254: U7.5 FB2.2 42.87,20.95 44.65,22.73 45.61,22.73 C26.2 45.63,22.73 46.18,22.73 46.69,23.24 U4.4
-12V
  Top 0.254: U4.11 C25.1 55.45,23.23 FB1.2
ADC1  (via drill 0.3)  (1 unrouted)
  Top 0.254: R6.1 C10.1 2.07,23.22 | 2.07,23.22 R8.2 | R8.2 2.06,23.74 R5.1 | U2.9 88.27,20.52 87.94,20.19 v83.39,20.19 | 2.1,23.24 2.07,23.22 | 2.64,23.55 2.25,23.55 2.18,23.61 | 2.18,23.61 R8.2 | 2.18,23.61 2.78,23.61 2.85,23.55
  Bottom 0.254: v2.87,23.55 2.64,23.55 2.64,20.42 5.38,17.68 41.5,17.68 42.49,16.69 58.22,16.69 58.6,17.07 73.48,17.07 76.58,20.19 v83.39,20.19
ADC2  (via drill 0.3)
  Top 0.254: U2.8 89.54,20.04 89.26,19.68 v82.75,19.68 | R20.1 R21.2 C9.1 R7.1 2.1,19.38 v2.79,19.38
  Bottom 0.254: v82.75,19.68 77.06,19.74 73.97,16.64 58.83,16.64 58.47,16.28 42.01,16.28 41.2,17.09 5.08,17.09 v2.79,19.38
AGND  (via drill 0.3)  (3 unrouted)
  Top 0.254: 20.99,12.6 20.99,13.69 C7.2 21.35,13.7 22.6,14.96 U1.45 v25.17,14.96 | 20.99,12.6 C13.2 | R25.1 R26.1 R29.1 R30.1 18.25,9.04 | C12.- 17.04,19.71 18.21,18.54 18.81,18.54 C11.2 C46.2 20.99,18.57 21.57,18.57 21.67,18.47 21.67,17.8 22.52,16.95 U1.41 25.23,16.95 v25.6,16.59 | 19.17,12.57 C8.- 19.99,12.56 | 19.99,12.56 20.96,12.56 20.99,12.6 | C16.- 19.85,12.43 19.99,12.56 | PCM5101.3 46.48,13.39 47.04,12.83 | R80.1 18.26,12.01 18.87,12.62 19.25,12.62 19.28,12.65 19.28,12.6 19.25,12.57 | C51.1 C50.1 50.77,14.74 50.77,14.17 | PCM5101.9 46.37,17.29 46.63,17.55 46.85,17.55 C47.2 v47.14,18.54 | C45.- 50.67,10.91 C22.- 50.7,11.05 51.77,12.12 51.77,13.56 51.49,13.84 51.03,13.84 50.77,14.1 50.77,14.17 | C48.1 47.36,12.94 47.65,13.23 47.65,13.54 47.95,13.84 50.44,13.84 50.77,14.17
  Top 0.406: C12.- 16.12,19.77 v15.98,19.91
  Top 0.61: v50.72,18.54 50.79,18.33 C51.1
  Bottom 0.254: v25.17,14.96 25.2,14.96 25.55,15.32 25.55,16.54 v25.6,16.59
  Bottom 0.406: 47.24,18.54 43.59,18.54 42.14,19.99 17.24,19.96 16.03,19.96 v15.98,19.91
  Bottom 0.61: v47.14,18.54 47.24,18.54 v50.72,18.54 53.5,21.22 LINE_IN.GND 54.56,30.37 54.56,34.27 56.19,35.89 56.19,38.38 55.55,39.01 LINE_OUT.GND
AMY_FOLLOWER_SCL  (via drill 0.3)
  Top 0.305: U2.5 v93.35,24.61 v93.34,24.61 | v79.35,40.82 v79.35,40.81 I2C_CONTROL.1
  Bottom 0.305: v93.34,24.61 93.8,25.07 93.8,36.88 89.86,40.82 v79.35,40.82
AMY_FOLLOWER_SDA  (via drill 0.3)
  Top 0.305: U2.4 94.62,24.36 v94.61,24.51 | v81.36,41.71 I2C_CONTROL.2
  Bottom 0.305: v94.61,24.51 94.61,37.26 90.17,41.71 v81.36,41.71
AMYIN  (via drill 0.3)
  Top 0.254: U2.17 79.43,19.07 79.3,18.95 v79.3,18.06 | v33.78,15.42 32.36,15.47 U1.17
  Bottom 0.254: v79.3,18.06 78.11,18.06 75.23,15.19 59.46,15.19 59.33,14.99 40.46,14.99 40.16,15.37 33.83,15.37 v33.78,15.42
AMYOUT  (via drill 0.3)
  Top 0.254: U2.6 92.08,19.48 91.16,18.57 v83.92,18.57 | v40.59,16.03 39.28,16.03 PCM5101.14 | U1.10 29.92,13.26 v30.28,13.72
  Bottom 0.254: v83.92,18.57 77.78,18.57 75.01,15.8 59.26,15.8 58.95,15.42 41.17,15.42 v40.59,16.03 32.69,16.03 v30.28,13.72
BCLK  (via drill 0.3)
  Top 0.254: U1.8 28.92,15.53 29.84,16.46 U1.19 36.34,16.45 36.52,16.64 PCM5101.13 40.28,16.64 40.62,16.97 v40.62,19.3 | U2.12 84.46,21.97 v84.28,21.84
  Bottom 0.254: v84.28,21.84 75.84,21.84 72.67,18.67 57.68,18.67 57.66,18.64 57.61,18.59 56.97,17.96 43.48,17.96 42.14,19.3 v40.62,19.3
CV_OUT1
  Top 0.254: U4.1 45.28,27.05 R27.1 45.26,40.46 40.72,45.01 16.3,45.01 CV_OUT1.LEFT/TIP
CV_OUT2  (via drill 0.3)
  Top 0.254: U4.7 46.06,19.43 R10.1 45.73,19.63 v43.33,19.63
  Bottom 0.254: v43.33,19.63 34.75,28.22 34.75,30.23 24.99,39.98 CV_OUT2.LEFT/TIP
DTR  (via drill 0.3)
  Top 0.305: Q5.2 82.02,3.82 | 82.02,3.82 82.72,3.82 R48.2 | v82.02,3.2 82.02,3.82
  Bottom 0.305: HOST.11 80.59,4.62 v82.02,3.2
ENABLE
  Top 0.305: U6.4 68.18,21.07 68.86,20.4 69.48,20.4 R14.2
ENABLE1
  Top 0.305: U3.4 71.01,19.96 R23.2
GND  (via drill 0.3)  (1 unrouted)
  Top 0.203: C5.2 arc103 34.66,18.57 33.43,18.57 | 95.59,0.53 98.6,0.51 | 18.73,20.25 19.79,21.31
  Top 0.254: USB.GND2 63.73,41.53 62.33,40.13 C85.1 | U1.21 33.27,17.45 33.68,17.04 35.05,17.04 | 35.05,17.04 35.2,17.2 35.2,17.96 35.23,17.98 35.2,17.98 | 35.05,17.04 37.82,17.04 38.1,17.32 39.21,17.32 | 39.21,17.32 PCM5101.12 | 39.21,17.32 39.21,17.9 PCM5101.11 39.24,19 38.58,19.66 38.58,20.92 U7.4 U7.3 | BOOT.3 95.59,0.53 | 98.6,0.51 99.36,1.45 99.52,1.45 99.54,1.42 99.57,1.42 98.81,2.18 98.81,2.95 | RST.4 92.61,1.96 RST.1 | U1.26 30.4,20.4 30.4,21.59 32.69,23.88 32.69,24.18 32.72,24.18 | Y1.2 18.73,20.25 | 19.79,21.31 19.81,21.57 19.96,21.72 19.96,21.74 19.99,21.77 19.99,21.73 Y1.4 | 33.43,18.57 33.3,18.44 32.72,18.44 32.69,18.47 U1.23 | C23.1 43.88,23.61 43.79,23.52 v43.74,23.52 | C24.1 44.69,20.74 v44.12,20.17 44.15,20.17 | v79.27,7.29 79.27,7.21 79.93,6.55 80.97,6.55 81.33,6.91 81.69,6.91 81.86,7.09 | C15.2 36.23,13.41 C41.1 | PCM5101.16 38.48,14.74 37.97,15.24 36.6,15.19 36.5,15.29 | v51.08,25.2 51.61,25.2 51.69,25.15 | 54.61,25.15 54.71,25.02
  Top 0.305: 51.69,25.15 54.61,25.15
  other vias: 97.1,0.66 50.16,24.33 49.02,26.47 49.76,25.78 51.18,26.31 83.03,9.83 83.06,10.82 83.01,11.84 83.87,11.38 83.82,10.29 84.73,11.86 84.68,10.79 84.63,9.6 85.5,10.11 85.45,11.25 85.42,12.52 86.21,11.94 86.18,10.67 86.18,9.47 87,10.06 86.94,11.3 87,12.65 87.76,11.99 87.83,13.16 87.71,10.74 87.76,9.5 88.52,10.11 88.57,11.35 88.49,12.55 22.07,20.98 21.95,21.82 21.06,22.05 20.9,22.94 8.2,4.93 8.18,3.2 8.1,1.02 9.53,2.03 11.91,2.03 14.5,2.01 13.21,0.94 10.74,0.99 10.54,3.12 13.21,2.92 18.92,6.81 20.55,6.86 22.66,6.53 22.68,5.33 22.58,3.91 22.58,2.51 22.53,1.14 26.42,1.17 30.33,0.84 33.6,0.81 33.53,3 35.03,2.08 30.28,2.9 32.31,2.03 18.9,11.46 18.87,10.34 18.87,9.3 21.23,7.98 20.78,9.3 27.25,4.27 27.18,5.69 30.33,5.41 32.21,5.33 34.32,5.28 36.6,5.28 38.28,11.2 46.3,29.69 47.88,29.69 48.59,30.76 48.56,35.79 48.54,38 47.22,36.91 47.24,38.91 46.25,38.05 46.18,35.89 46.23,39.95 42.77,44.09 44.04,42.93 45.09,41.71 45.14,42.93 43.99,44.2 45.11,44.22 84.3,0.99 86.41,0.97 83.06,2.82 84.07,2.79 85.09,2.92 77.57,3.84 76.76,7.24 74.55,6.07 75.56,7.54 75.56,8.86 76.83,8.71 74.55,11.99 73.91,10.77 74.63,9.47 75.26,10.49 76.15,9.78 78.05,8.1 77.7,10.9 78.49,10.26 79.32,9.42 79.32,10.44 76.35,13.31 68.61,12.04 67.61,11.33 59.46,12.14 60.86,12.14 62.41,12.09 64.19,12.04 63.17,10.9 61.65,10.95 60.25,11.3 64.97,10.74 65.38,12.01 66.17,9.55 63.91,9.32 62.08,9.04 62.66,9.91 56.85,11.13 58.45,11.05 59.72,9.78 58.8,8.43 57.33,8.28 57.84,9.42 56.85,9.96 57.25,6.4 57.25,4.52 57.25,2.84 57.18,0.94 58.6,1.78 58.65,3.81 58.52,5.66 59.66,2.77 59.89,0.89 61.8,0.89 63.55,0.86 65.53,0.84 64.34,1.85 62.69,1.91 60.81,1.91 61.95,2.82 63.55,2.79 6.96,0.97 2.18,5.46 4.01,5.69 5.66,2.03 5.69,4.72 0.71,4.5 0.69,6.68 29.11,26.64 25.68,25.48 26.95,25.5 29.13,25.1 29.16,23.8 29.18,22.3 24.69,21.77 0.84,43.08 0.86,41.73 0.81,40.03 0.84,38.81 0.86,37.34 0.84,36.25 0.81,34.24 0.84,32.56 1.96,33.45 1.93,35.51 1.98,37.87 2.06,39.55 1.98,40.87 0.86,30.45 0.79,28.35 0.76,26.75 0.76,24.84 1.75,29.31 1.93,31.39 2.95,32.46 3.1,34.37 3.02,36.6 3.1,38.51 3.45,41.96 4.06,47.14 6.73,47.19 5.64,45.87 7.47,44.81 7.72,42.29 10.21,44.58 8.89,43.48
  pour Bottom: -10,60 120,60 120,-10 -10,-10
  pour Top: -11,61 121,61 121,-11 -11,-11
I2C_SCL  (via drill 0.3)
  Top 0.254: U7.1 34.24,20.39 U1.25 v30.92,18.78 v30.91,18.77 | U2.11 85.73,21.67 85.37,21.31 v83.41,21.31 | v7.67,18.77 3.28,14.38 v3.28,7.37
  Bottom 0.254: v3.28,7.37 3.31,7.34 I2C_HOST.1 | v83.41,21.31 76.1,21.31 72.82,18.03 57.78,18.03 57.28,17.53 43.18,17.53 41.94,18.77 v30.91,18.77 v7.67,18.77
I2C_SDA  (via drill 0.3)  (1 unrouted)
  Top 0.254: U7.2 36.07,19.51 | 36.07,19.51 35.51,19.07 32.35,19.07 U1.24 | U2.10 87,21.24 86.49,20.73 v82.78,20.73 | v8.2,18.24 3.96,13.99 v3.96,9.35 | 36.07,19.51 36.65,18.92 v36.65,18.24
  Bottom 0.254: v8.2,18.24 v36.65,18.24 41.68,18.24 42.82,17.09 57.76,17.09 58.24,17.58 73.13,17.58 73.23,17.68 | v3.96,9.35 3.97,9.34 I2C_HOST.2 | v82.78,20.73 76.3,20.73 73.13,17.55
IO0
  Top 0.305: BOOT.2 93.58,4.75 82.42,4.75 81.92,5.26 U2.27 80.99,5.88 79.05,3.94 Q5.3 77.69,2.87 R49.1
IO19  (via drill 0.3)
  Top 0.305: U2.13 v83.19,24.79 | v67.54,37.72 R45.2
  Bottom 0.305: v83.19,24.79 83.19,34.8 80.29,37.69 67.56,37.69 v67.54,37.72
IO20  (via drill 0.3)
  Top 0.305: U2.14 v81.92,24.79 | v66.5,37.41 R46.2
  Bottom 0.305: v81.92,24.79 81.92,34.62 79.88,36.65 67.26,36.65 v66.5,37.41
LIN  (via drill 0.3)
  Top 0.305: R2.2 v23.06,8.08 | v53.98,6.73 53.98,11.35 53.75,11.58 v53.57,18.54
  Bottom 0.305: v23.06,8.08 24.41,6.73 v53.98,6.73 | v53.57,18.54 55.52,20.22 55.6,26.14 58.06,28.6 LINE_IN.LEFT/TIP
LINX
  Top 0.254: U1.47 23.05,13.96 22.76,13.66 22.76,9.41 C43.+
LOUT  (via drill 0.3)
  Top 0.254: U4.8 52.78,19.62 R22.1 54.46,19.46 54.99,18.92 v55.24,18.47
  Bottom 0.305: v55.24,18.47 57.25,20.22 57.2,26.44 59.82,29.06 59.82,40.87 LINE_OUT.LEFT/TIP
LOUT_2V  (via drill 0.3)
  Top 0.254: C50.2 50.18,14.81 v49.2,14.48 R51.1
  Top 0.305: U4.10 51.28,21.97 50.98,21.67 50.98,19.28 51.59,18.67 v51.54,14.48
  Bottom 0.254: v49.2,14.48 51.46,14.53 v51.54,14.48
LRC  (via drill 0.3)  (1 unrouted)
  Top 0.254: PCM5101.15 | v29.41,10.79 U1.9 29.42,15.22 30.15,15.95 U1.18 37.89,15.96 38.56,15.29 39.14,15.29 39.19,15.34
  Top 0.305: U2.38 95.89,6.96 94.08,8.76 v83.11,8.76
  Bottom 0.254: v83.11,8.76 78.89,8.76 74.88,12.78 54.05,12.78 53.8,12.52 33.2,12.52 31.47,10.79 v29.41,10.79
MCLK  (via drill 0.3)
  Top 0.254: U2.15 78.94,21.61 78.74,21.41 v78.74,17.53 | U1.20 28.71,16.95 v26.67,14.91
  Bottom 0.254: v78.74,17.53 75.84,14.55 53.01,14.55 52.55,13.97 32,13.97 30.71,12.62 27.66,12.62 26.67,13.82 v26.67,14.91
MIDI_IN  (via drill 0.3)
  Top 0.254: R35.2 5.51,25.09 U15.4 7.32,25.35 9.2,23.47 v9.2,14.58 | U2.23 v79.48,11.46
  Bottom 0.254: v79.48,11.46 77.11,11.46 74.52,14.1 53.54,14.1 53.01,13.51 32.44,13.51 31.01,12.09 11.68,12.09 v9.2,14.58
MIDI_OUT
  Top 0.305: U2.22 R37.2
MPIO  (via drill 0.3)
  Top 0.254: U2.7 90.81,19.61 90.37,19.18 v83.26,19.18 | v28.37,13.77 28.42,13.57 U1.7 28.42,12.01 28.42,11.98 28.4,11.96
  Bottom 0.254: v83.26,19.18 77.42,19.18 74.47,16.23 59.03,16.2 58.65,15.82 41.73,15.85 41.02,16.56 31.17,16.56 v28.37,13.77
N$1
  Top 0.254: U1.37 23.99,22.6 C1.1
N$2
  Top 0.254: R3.1 C4.2
N$3
  Top 0.254: U1.15 33.99,14.46 C4.1
N$4
  Top 0.254: 1-10VPP.1 26.06,2.03 24.61,3.48 24.61,8.01 R2.1 24.68,9.22 C43.-
N$5
  Top 0.254: 1-10VPP.2 27.25,3.3 26.44,4.12 26.44,7.92 R1.1 26.53,8.05 C44.-
N$6
  Top 0.254: C8.+ 19.21,14.59 C7.1 20.99,14.61 21.51,14.61 22.36,15.46 U1.44
N$7
  Top 0.254: U1.43 21.9,15.96 21.64,15.7 21.02,15.7 C17.2 19.96,15.71 C6.2
N$8
  Top 0.254: C6.1 18,15.72 R4.1
N$13  (via drill 0.3)
  Top 0.254: R7.2 v2.08,17.6 | v3.02,29.59 5.23,29.23 10.87,34.87 10.9,34.9 11.35,35.36 22.35,35.36 24.71,33 CV_IN2.LEFT/TIP
  Bottom 0.254: v2.08,17.6 2.08,26.98 3.02,27.91 v3.02,29.59
N$15
  Top 0.305: U3.1 73.9,23.75 | 73.9,23.75 73.9,27.12 L1.P$2 | D6.A 73.91,23.74 73.9,23.75
N$16
  Top 0.305: C31.2 57.23,15.7 | 57.23,15.7 59.09,15.72 D10.A | FB1.1 57.23,19.62 57.23,15.7
N$18
  Top 0.254: U7.8 37.34,24.54 37.85,24.03 43.61,24.03 44.08,24.5 C23.2 44.51,24.51 U4.3
N$19
  Top 0.254: R5.2 2.06,27.38 2.64,27.96 5.46,28.7 9.65,32.89 CV_IN1.LEFT/TIP
N$20  (via drill 0.3)
  Top 0.254: U4.5 45.07,21.97 C24.2 44.49,21.63 v43.61,20.75 | v42.93,24.69 42.67,24.43 39.34,24.43 38.61,25.17 U7.7
  Bottom 0.254: v43.61,20.75 42.93,21.44 v42.93,24.69
N$21
  Top 0.305: L3.P$2 66.04,23.51 U6.1 63.53,22.97 D8.A 63.07,22.24 C30.1
N$22
  Top 0.254: U7.10 C42.+ | C42.+
N$23  (via drill 0.3)
  Top 0.305: D5.A D3.C v61.39,32.74 | Q1.1 76.14,32.16 | 76.14,32.16 76.14,31.67 R11.2 | D4.C 75.49,32.21 | 75.49,32.21 76.09,32.21 76.14,32.16 | v75.41,32.69 75.41,32.28 75.49,32.21
  Bottom 0.305: v61.39,32.74 v75.41,32.69
N$24  (via drill 0.3)  (1 unrouted)
  Top 0.305: C106.1 81.51,28.82 U16.3 79.93,27.76 79.65,27.48 v78.89,27.48 78.44,27.48 78.04,27.87 U16.1 | D5.C v63.07,24.23
  Bottom 0.254: v63.07,24.23 75.62,24.23 78.05,26.67
  Bottom 0.305: 78.03,26.62 v78.89,27.48
N$25
  Top 0.305: R34.1 71.97,22.39 U3.3 70.62,22.36 C32.1 R33.2
N$26
  Top 0.305: U6.3 R18.1 65.49,18.73 C29.2 66.02,17.51 R19.2
N$28
  Top 0.305: R16.2 66.94,21.83 67.13,22.02 U6.5
N$29
  Top 0.305: D10.C 59.37,20.02 C30.2 61.54,18.41 D9.A
N$31
  Top 0.254: U4.6 45.91,20.7 R10.2
  Top 0.305: R13.1 49.02,18.66 49.02,20.5 48.82,20.7 U4.6
N$32
  Top 0.305: R15.2 U3.5
N$33
  Top 0.254: U4.2 45.63,25.78 R27.2
  Top 0.305: R12.1 49.53,17.92 49.53,25.04 48.79,25.78 U4.2
N$34
  Top 0.305: R48.1 85.18,3.83 Q2.1
N$35
  Top 0.254: 1-10VPP.5 R30.2
N$36
  Top 0.254: 1-10VPP.6 R29.2
N$37
  Top 0.305: Q5.1 R9.1
N$38
  Top 0.305: USB.A5 68.2,39.83 R53.1
N$39
  Top 0.305: USB.B5 65.2,39.79 R52.1
N$40
  Top 0.254: 1-10VPP.8 19.16,2.03 R25.2
N$41
  Top 0.254: 1-10VPP.7 R26.2
N$42  (via drill 0.3)
  Top 0.305: USB.VBUS2 64.5,40.86 v64.21,40.56 63.96,40.31 FB3.1 | v69.39,40.56 69.39,41.76 USB.VBUS1
  Bottom 0.305: v64.21,40.56 v69.39,40.56
N$44  (via drill 0.3)  (2 unrouted)
  Top 0.254: 1-10VPP.3 v29.44,4.57 | R22.2 52.77,20.51 52.58,20.7 | 55.83,19.14 55.83,19.25 55.19,19.89 55.19,20.22 54.91,20.5 54.3,20.5
  Top 0.305: v55.22,4.75 55.22,17.32 55.83,17.93 55.83,19.14
  Bottom 0.305: v29.44,4.57 55.04,4.57 v55.22,4.75
N$45  (via drill 0.3)
  Top 0.254: 1-10VPP.4 29.26,5.84 29.41,5.99 v29.49,5.99
  Top 0.305: U4.13 54.67,25.78 R28.2 54.83,25.91 v56.19,25.91 | v54.3,18.47 54.48,11.81 54.66,11.63 54.66,5.36 v54.59,5.99
  Bottom 0.305: v54.3,18.47 56.24,20.07 v56.19,25.91 | v29.49,5.99 v54.59,5.99
N$48
  Top 0.254: PCM5101.18 C41.2 | C41.2 | C41.2 C2.+
N$50
  Top 0.254: PCM5101.7 47.88,15.99 R50.2
N$51
  Top 0.254: C49.2 42.56,12.76 43.84,14.05 45.08,14.05 PCM5101.4
N$52
  Top 0.254: PCM5101.2 43.83,12.74 43.46,12.37 43.46,10.81 C49.1
N$55  (via drill 0.3)
  Top 0.254: U15.2 17.42,25.47 D13.+ 23.2,26.17 v24.36,27.33 | v26.77,27.38 32.44,33.05 MIDI_IN.LEFT/TIP
  Bottom 0.254: v24.36,27.33 v26.77,27.38
N$56
  Top 0.254: R36.1 23.84,25.51 28.04,29.72 MIDI_IN.RIGHT/RING
N$57
  Top 0.254: U15.1 17.42,22.93 D13.- 18.28,24.62 R36.2
N$58  (via drill 0.3)
  Top 0.254: R37.1 v77.57,12.72
  Bottom 0.254: v77.57,12.72 83.16,12.72 84.81,14.3 84.81,34.29 74.5,44.58 60.58,44.58 59.79,45.01 38.76,45.09 MIDI_OUT.LEFT/TIP
N$59  (via drill 0.3)
  Top 0.254: R38.1 4.1,26.84 v4.12,26.98
  Bottom 0.254: v4.12,26.98 4.14,37.39 11.76,45.01 26.29,45.01 28.04,43.26 MIDI_OUT.RIGHT/RING
N$75
  Top 0.305: SD1.1 88.51,37.24 R39.1
N$77
  Top 0.305: SD1.8 87.62,29.54 R43.1
OUTL
  Top 0.254: PCM5101.6 47.47,15.34 R51.2
RESET  (via drill 0.3)
  Top 0.305: R47.1 C36.2 95.89,25.34 U2.3 v95.89,21.67 | Q2.3 87.24,2.88 RST.2 88.23,2.88 v88.21,2.9
  Bottom 0.305: v88.21,2.9 95.89,10.57 v95.89,21.67
RIN  (via drill 0.3)
  Top 0.305: R1.2 v28.02,7.92 | v53.42,7.32 53.42,10.97 53.06,11.33 v52.88,18.67 | v56.95,30.28 54.23,32.99 v53.03,32.99
  Bottom 0.305: v28.02,7.92 28.63,7.32 v53.42,7.32 | v52.88,18.67 54.91,20.45 54.97,26.47 57.02,28.52 v56.95,30.28 | v53.03,32.99 v53.03,33 LINE_IN.RIGHT/RING
RINX
  Top 0.254: U1.48 23.99,11.82 24.92,10.9 26.88,10.9 C44.+
ROUT
  Top 0.305: U4.14 54.57,27.05 R28.1
  Top 0.61: U4.14 50.65,27.05 50.19,27.51 50.19,29.72 52.12,31.65 52.12,34.47 50.04,36.55 LINE_OUT.RIGHT/RING
ROUT_2V
  Top 0.254: R50.1 C51.2
  Top 0.305: U4.12 51.31,24.51 50.04,23.24 50.04,15.99 C51.2
RTS  (1 unrouted)
  Top 0.254: 82.56,0.81 83.16,0.81 83.69,1.35 83.69,1.88 83.67,1.91
  Top 0.305: R9.2 Q2.2 | 82.56,0.81 67.08,0.81 HOST.3
RXD/IO44  (via drill 0.3)
  Top 0.305: HOST.7 70.46,2.52 75.44,2.52 76.38,3.45 v76.38,5.31 | v84.38,7.29 92.81,7.29 93.34,6.76 U2.36
  Bottom 0.305: v76.38,5.31 82.37,5.28 v84.38,7.29
SPDIFIN_SIGNAL  (via drill 0.3)
  Top 0.254: C1.2 24,24.89 25.45,26.34 27.58,26.34 28.83,27.58 32.97,27.58 35.43,30.05 39.73,30.05 v42.65,32.97
  Bottom 0.254: v42.65,32.97 46.96,32.97 SPDIF_IN.LEFT/TIP
SPDIFOUT_SIGNAL  (via drill 0.3)
  Top 0.305: R3.2 34.02,7.96 v34.01,7.95 | v52.86,7.95 52.86,10.46 52.3,11.02 v52.2,18.54
  Bottom 0.305: v34.01,7.95 v52.86,7.95
  Bottom 0.406: v52.2,18.54 52.2,18.82 54.23,20.85 54.23,26.77 55.98,28.52 55.98,34.37 57.23,35.61 57.23,39.06 55.75,40.54 51.64,40.54 50.75,39.65 48.69,39.65 46.99,41.35 SPDIF_OUT.LEFT/TIP | SPDIF_OUT.LEFT/TIP
SPI0_CS0  (via drill 0.3)
  Top 0.254: HOST.4 64.87,8.76 66.42,8.76 73.53,15.88 74.35,15.88
  Top 0.305: SD1.2 88.48,36.14 R40.1 D12.1 88.35,34.25 v88.37,34.27 | v86.03,17.8 U2.18 80.16,17.8 78.23,15.88 74.35,15.88
  Bottom 0.305: v86.03,17.8 86.03,31.93 v88.37,34.27
SPI0_MISO  (via drill 0.3)
  Top 0.305: R42.1 87.63,30.64 88.04,30.64 | 88.04,30.64 v88.32,30.64 SD1.7 | D12.6 88.04,32.21 88.04,30.64 | v88.11,13.99 U2.21 75.18,13.99 HOST.8
  Bottom 0.305: v88.11,13.99 88.11,30.44 v88.32,30.64
SPI0_MOSI  (via drill 0.3)
  Top 0.305: D12.3 v85.65,34.25 85.12,34.25 R41.1 | v85.32,16.54 U2.19 79.96,16.54 78.69,15.27 73.91,15.27 HOST.6 | v89.28,35.03 90.97,35.03 SD1.3
  Bottom 0.305: v89.28,35.03 89.26,35 86.55,35 v85.65,34.25 85.32,33.84 v85.32,16.54
SPI0_SCK  (via drill 0.3)
  Top 0.305: R44.1 87.05,31.41 v87.05,31.85 D12.5 | v87.22,15.21 87.17,15.27 U2.20 79.7,15.27 79.07,14.63 74.62,14.63 v69.24,9.25 | v89.84,32.82 SD1.5 | v71.88,9.25 70.89,8.26 HOST.10
  Bottom 0.305: v87.22,15.21 87.22,31.67 | 87.22,31.67 v87.05,31.85 | 87.22,31.67 87.22,32.16 87.91,32.84 v89.84,32.82 | v69.24,9.25 v71.88,9.25
TXD/IO43  (via drill 0.3)
  Top 0.305: HOST.9 72.34,3.17 75.23,3.17 75.62,3.56 v75.62,6.27 | v83.19,7.44 83.87,8.13 93.4,8.13 94.62,6.91 U2.37
  Bottom 0.305: v75.62,6.27 82.02,6.27 v83.19,7.44
USB_D+
  Top 0.305: R46.1 66.2,39.83 USB.B6 66.2,42.68 66.42,42.9 67.03,42.9 67.2,42.73 USB.A6
USB_D-
  Top 0.305: USB.B7 67.7,40.72 | 67.7,40.72 67.7,39.67 R45.1 | USB.A7 66.7,40.87 66.85,40.72 67.7,40.72
VNEG
  Top 0.254: PCM5101.5 46.41,14.69 C48.2
VPWR
  Top 0.305: D2.C D14.C 66.95,35.28 66.04,34.37 66.04,32.21 | 66.04,32.21 L3.P$1 68.54,29.16 68.62,29.07 68.89,28.81 | D1.C 66.04,32.21 | 68.89,28.81 L1.P$1 | R14.1 R23.1 69.15,21.27 68.89,21.54 68.89,28.81
XTI
  Top 0.254: U1.39 22.99,17.95 22.76,18.19 22.76,22.02 20.95,23.82 19.28,23.82 19.07,23.62 19.07,23.05 C18.2 19.06,22 Y1.1
XTO
  Top 0.254: U1.40 22.73,17.45 22.23,17.96 22.23,18.96 C19.2 19.97,20.05 Y1.3

## Text on the board
tPlace: + | + | + | + | + | + | + | + | + | + | + | +
bPlace: OUT1 | OUT | OUT | OUT | MIDIIN/ | SPDIFIN/ | LINEIN/ | CVIN/ | OUT2 | CVIN/ | AmyBoard | V1.0
Measures: Units: Inches | Units: Inches